# EAGLE board QSPI-Breakout-Panel (EAGLE 9.6.2), part 1 of 2
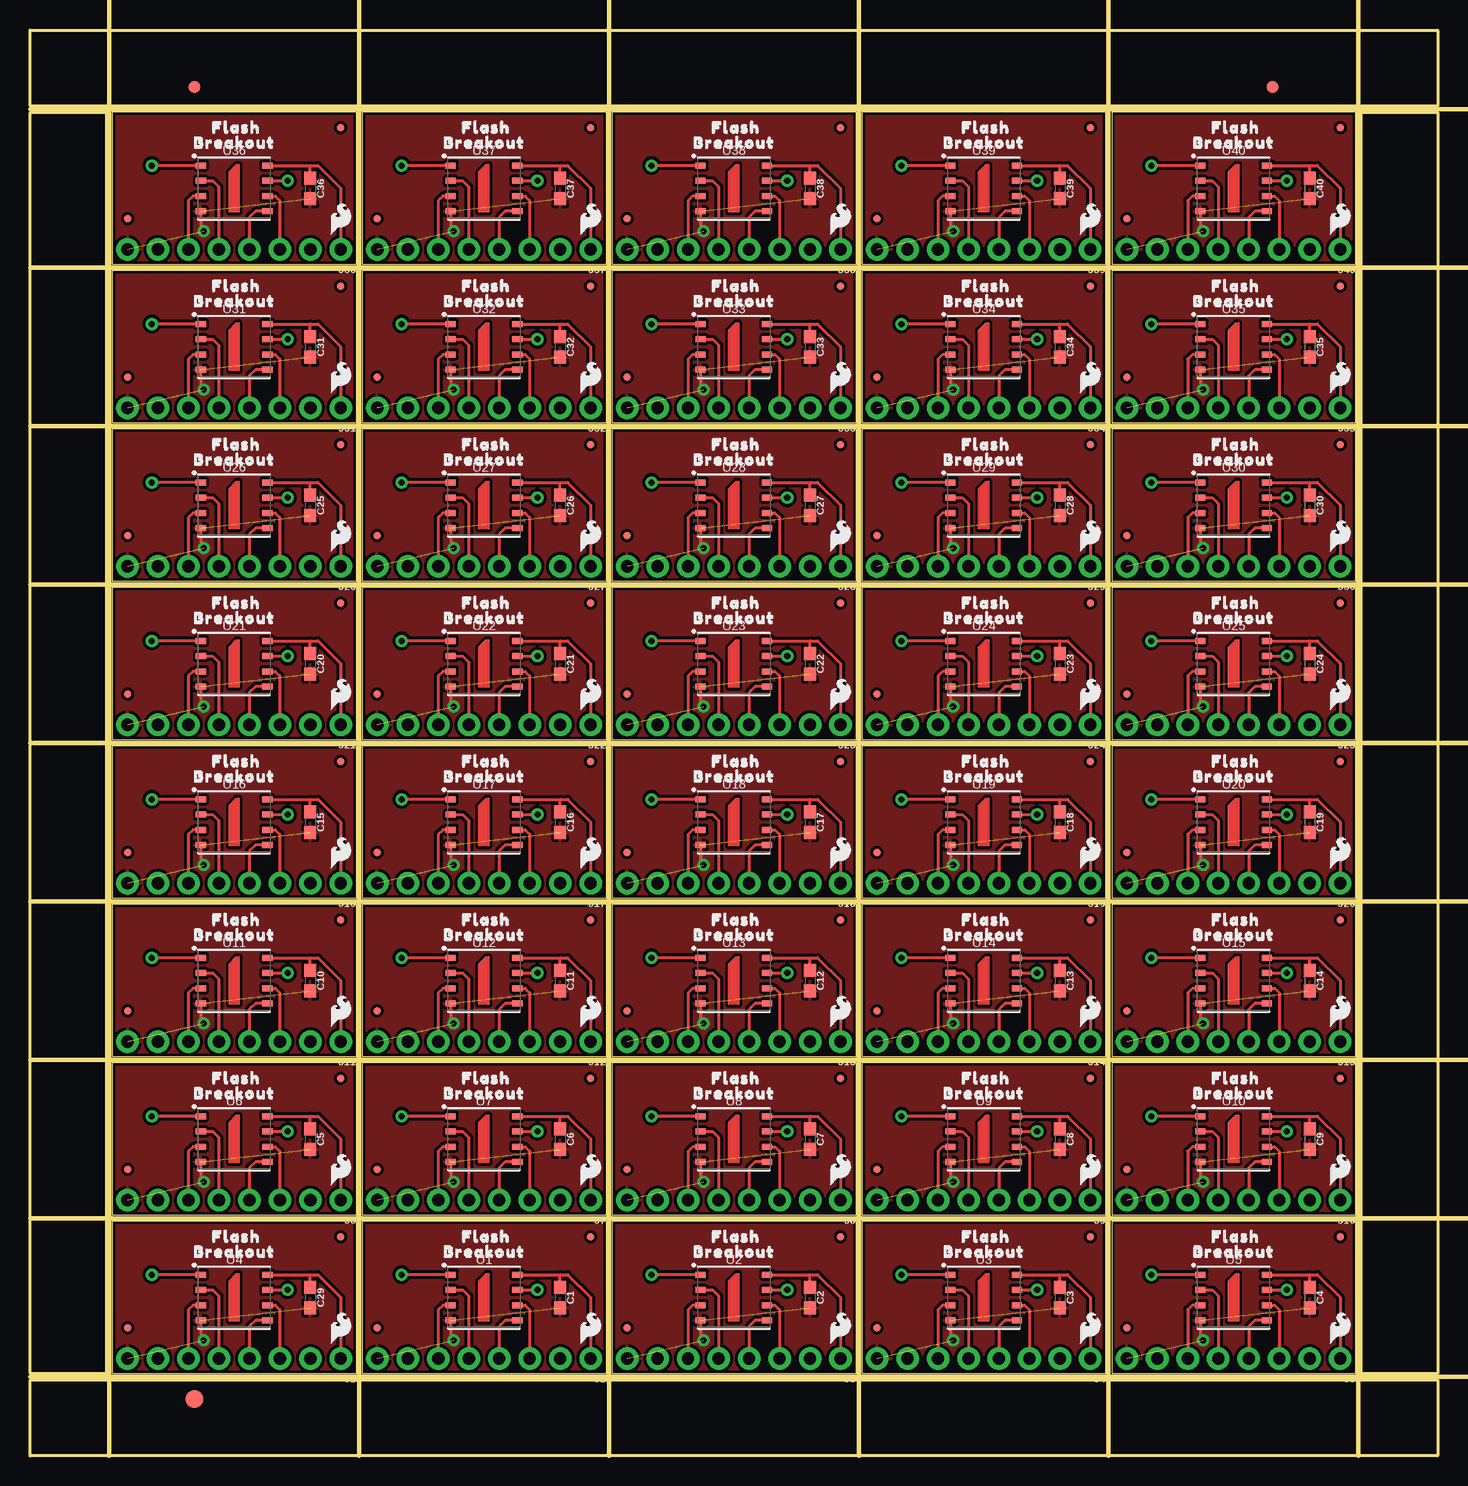
[diagram p0: board, top side]
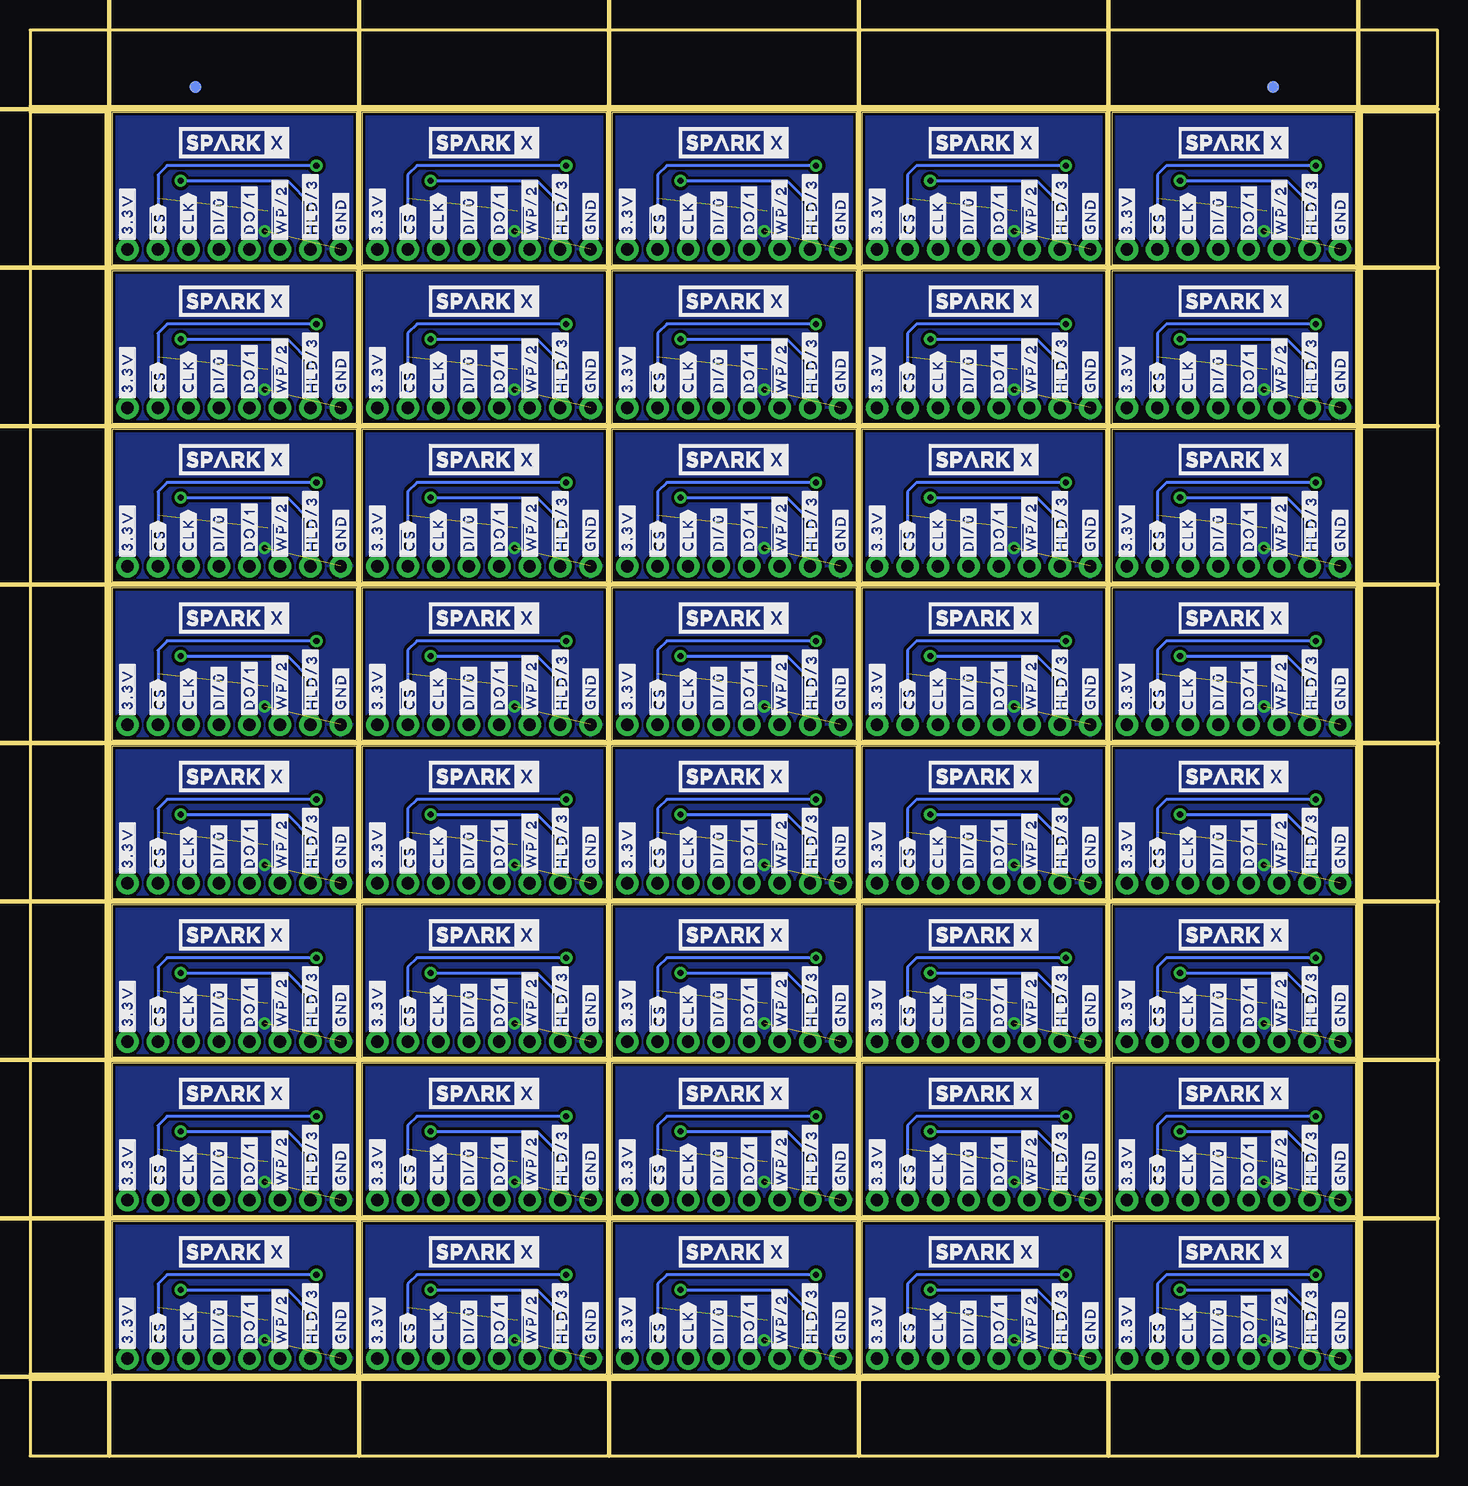
[diagram p1: board, bottom side, seen from below]

Size 117.35 x 118.87 mm. Coordinates in mm from the lower left corner, seen from the top.
Outline: 176 segments
Copper layers (1*16): Top 0.035mm / dielectric 1.5mm / Bottom 0.035mm
Design rules "QSPI-Breakout": minimum track width 10mil, minimum drill 20mil, track to track 10mil, track to pad 8mil, pad to pad 8mil, via to via 10mil, smd to smd 8mil, copper to edge 8mil, drill to drill 8mil, minimum pad ring 10mil, minimum via ring 10mil, stop-mask expansion 4mil, vias tented up to drill 25mil, thermal gap 10mil
Net classes: 2 Clock: width 0.089 mm, clearance 0.178 mm
Milling: 15 lines

## Footprints (pad centres in the part's own frame; a part is rotated, then mirrored left to right if it is on the bottom)
0603 = smd 1.1 x 1: 1 -0.85,0; 2 0.85,0
FIDUCIAL-1X2 = smd 1 x 1: 1 0,0
FIDUCIAL-1.5X3 = smd 1.5 x 1.5: 1 0,0
FIDUCIAL-MICRO = smd 0.635 x 0.635: 1 0,0
1X08_NO_SILK = drill 1.016 pad 1.88: 1 0,0; 2 2.54,0; 3 5.08,0; 4 7.62,0; 5 10.16,0; 6 12.7,0; 7 15.24,0; 8 17.78,0
WSON-8-6X5-SKINNY_CENTERPAD = smd 0.85 x 0.5: 1 -2.775,1.905; 2 -2.775,0.635; 3 -2.775,-0.635; 4 -2.775,-1.905; 5 2.775,-1.905; 6 2.775,-0.635; 7 2.775,0.635; 8 2.775,1.905

## Placement (x,y rotation side)
C1  0.1uF  [0603]  44.2,13.21 270 top
C2  0.1uF  [0603]  65.02,13.21 270 top
C3  0.1uF  [0603]  85.85,13.21 270 top
C4  0.1uF  [0603]  106.68,13.21 270 top
C5  0.1uF  [0603]  23.37,26.42 270 top
C6  0.1uF  [0603]  44.2,26.42 270 top
C7  0.1uF  [0603]  65.02,26.42 270 top
C8  0.1uF  [0603]  85.85,26.42 270 top
C9  0.1uF  [0603]  106.68,26.42 270 top
C10  0.1uF  [0603]  23.37,39.62 270 top
C11  0.1uF  [0603]  44.2,39.62 270 top
C12  0.1uF  [0603]  65.02,39.62 270 top
C13  0.1uF  [0603]  85.85,39.62 270 top
C14  0.1uF  [0603]  106.68,39.62 270 top
C15  0.1uF  [0603]  23.37,52.83 270 top
C16  0.1uF  [0603]  44.2,52.83 270 top
C17  0.1uF  [0603]  65.02,52.83 270 top
C18  0.1uF  [0603]  85.85,52.83 270 top
C19  0.1uF  [0603]  106.68,52.83 270 top
C20  0.1uF  [0603]  23.37,66.04 270 top
C21  0.1uF  [0603]  44.2,66.04 270 top
C22  0.1uF  [0603]  65.02,66.04 270 top
C23  0.1uF  [0603]  85.85,66.04 270 top
C24  0.1uF  [0603]  106.68,66.04 270 top
C25  0.1uF  [0603]  23.37,79.25 270 top
C26  0.1uF  [0603]  44.2,79.25 270 top
C27  0.1uF  [0603]  65.02,79.25 270 top
C28  0.1uF  [0603]  85.85,79.25 270 top
C29  0.1uF  [0603]  23.37,13.21 270 top
C30  0.1uF  [0603]  106.68,79.25 270 top
C31  0.1uF  [0603]  23.37,92.46 270 top
C32  0.1uF  [0603]  44.2,92.46 270 top
C33  0.1uF  [0603]  65.02,92.46 270 top
C34  0.1uF  [0603]  85.85,92.46 270 top
C35  0.1uF  [0603]  106.68,92.46 270 top
C36  0.1uF  [0603]  23.37,105.66 270 top
C37  0.1uF  [0603]  44.2,105.66 270 top
C38  0.1uF  [0603]  65.02,105.66 270 top
C39  0.1uF  [0603]  85.85,105.66 270 top
C40  0.1uF  [0603]  106.68,105.66 270 top
E$1  [FIDUCIAL-1X2]  13.72,114.11 0 top
E$2  [FIDUCIAL-1X2]  13.72,114.11 0 bottom
E$3  [FIDUCIAL-1X2]  103.57,114.11 0 top
E$4  [FIDUCIAL-1X2]  103.57,114.11 0 bottom
E$5  [FIDUCIAL-1.5X3]  13.72,4.76 0 top
FD1  FIDUCIALUFIDUCIAL  [FIDUCIAL-MICRO]  25.91,18.29 0 top
FD2  FIDUCIALUFIDUCIAL  [FIDUCIAL-MICRO]  8.13,10.67 0 top
FD3  FIDUCIALUFIDUCIAL  [FIDUCIAL-MICRO]  46.74,18.29 0 top
FD4  FIDUCIALUFIDUCIAL  [FIDUCIAL-MICRO]  28.96,10.67 0 top
FD5  FIDUCIALUFIDUCIAL  [FIDUCIAL-MICRO]  67.56,18.29 0 top
FD6  FIDUCIALUFIDUCIAL  [FIDUCIAL-MICRO]  49.78,10.67 0 top
FD7  FIDUCIALUFIDUCIAL  [FIDUCIAL-MICRO]  88.39,18.29 0 top
FD8  FIDUCIALUFIDUCIAL  [FIDUCIAL-MICRO]  70.61,10.67 0 top
FD9  FIDUCIALUFIDUCIAL  [FIDUCIAL-MICRO]  109.22,18.29 0 top
FD10  FIDUCIALUFIDUCIAL  [FIDUCIAL-MICRO]  91.44,10.67 0 top
FD11  FIDUCIALUFIDUCIAL  [FIDUCIAL-MICRO]  25.91,31.5 0 top
FD12  FIDUCIALUFIDUCIAL  [FIDUCIAL-MICRO]  8.13,23.88 0 top
FD13  FIDUCIALUFIDUCIAL  [FIDUCIAL-MICRO]  46.74,31.5 0 top
FD14  FIDUCIALUFIDUCIAL  [FIDUCIAL-MICRO]  28.96,23.88 0 top
FD15  FIDUCIALUFIDUCIAL  [FIDUCIAL-MICRO]  67.56,31.5 0 top
FD16  FIDUCIALUFIDUCIAL  [FIDUCIAL-MICRO]  49.78,23.88 0 top
FD17  FIDUCIALUFIDUCIAL  [FIDUCIAL-MICRO]  88.39,31.5 0 top
FD18  FIDUCIALUFIDUCIAL  [FIDUCIAL-MICRO]  70.61,23.88 0 top
FD19  FIDUCIALUFIDUCIAL  [FIDUCIAL-MICRO]  109.22,31.5 0 top
FD20  FIDUCIALUFIDUCIAL  [FIDUCIAL-MICRO]  91.44,23.88 0 top
FD21  FIDUCIALUFIDUCIAL  [FIDUCIAL-MICRO]  25.91,44.7 0 top
FD22  FIDUCIALUFIDUCIAL  [FIDUCIAL-MICRO]  8.13,37.08 0 top
FD23  FIDUCIALUFIDUCIAL  [FIDUCIAL-MICRO]  46.74,44.7 0 top
FD24  FIDUCIALUFIDUCIAL  [FIDUCIAL-MICRO]  28.96,37.08 0 top
FD25  FIDUCIALUFIDUCIAL  [FIDUCIAL-MICRO]  67.56,44.7 0 top
FD26  FIDUCIALUFIDUCIAL  [FIDUCIAL-MICRO]  49.78,37.08 0 top
FD27  FIDUCIALUFIDUCIAL  [FIDUCIAL-MICRO]  88.39,44.7 0 top
FD28  FIDUCIALUFIDUCIAL  [FIDUCIAL-MICRO]  70.61,37.08 0 top
FD29  FIDUCIALUFIDUCIAL  [FIDUCIAL-MICRO]  109.22,44.7 0 top
FD30  FIDUCIALUFIDUCIAL  [FIDUCIAL-MICRO]  91.44,37.08 0 top
FD31  FIDUCIALUFIDUCIAL  [FIDUCIAL-MICRO]  25.91,57.91 0 top
FD32  FIDUCIALUFIDUCIAL  [FIDUCIAL-MICRO]  8.13,50.29 0 top
FD33  FIDUCIALUFIDUCIAL  [FIDUCIAL-MICRO]  46.74,57.91 0 top
FD34  FIDUCIALUFIDUCIAL  [FIDUCIAL-MICRO]  28.96,50.29 0 top
FD35  FIDUCIALUFIDUCIAL  [FIDUCIAL-MICRO]  67.56,57.91 0 top
FD36  FIDUCIALUFIDUCIAL  [FIDUCIAL-MICRO]  49.78,50.29 0 top
FD37  FIDUCIALUFIDUCIAL  [FIDUCIAL-MICRO]  88.39,57.91 0 top
FD38  FIDUCIALUFIDUCIAL  [FIDUCIAL-MICRO]  70.61,50.29 0 top
FD39  FIDUCIALUFIDUCIAL  [FIDUCIAL-MICRO]  109.22,57.91 0 top
FD40  FIDUCIALUFIDUCIAL  [FIDUCIAL-MICRO]  91.44,50.29 0 top
FD41  FIDUCIALUFIDUCIAL  [FIDUCIAL-MICRO]  25.91,71.12 0 top
FD42  FIDUCIALUFIDUCIAL  [FIDUCIAL-MICRO]  8.13,63.5 0 top
FD43  FIDUCIALUFIDUCIAL  [FIDUCIAL-MICRO]  46.74,71.12 0 top
FD44  FIDUCIALUFIDUCIAL  [FIDUCIAL-MICRO]  28.96,63.5 0 top
FD45  FIDUCIALUFIDUCIAL  [FIDUCIAL-MICRO]  67.56,71.12 0 top
FD46  FIDUCIALUFIDUCIAL  [FIDUCIAL-MICRO]  49.78,63.5 0 top
FD47  FIDUCIALUFIDUCIAL  [FIDUCIAL-MICRO]  88.39,71.12 0 top
FD48  FIDUCIALUFIDUCIAL  [FIDUCIAL-MICRO]  70.61,63.5 0 top
FD49  FIDUCIALUFIDUCIAL  [FIDUCIAL-MICRO]  109.22,71.12 0 top
FD50  FIDUCIALUFIDUCIAL  [FIDUCIAL-MICRO]  91.44,63.5 0 top
FD51  FIDUCIALUFIDUCIAL  [FIDUCIAL-MICRO]  25.91,84.33 0 top
FD52  FIDUCIALUFIDUCIAL  [FIDUCIAL-MICRO]  8.13,76.71 0 top
FD53  FIDUCIALUFIDUCIAL  [FIDUCIAL-MICRO]  46.74,84.33 0 top
FD54  FIDUCIALUFIDUCIAL  [FIDUCIAL-MICRO]  28.96,76.71 0 top
FD55  FIDUCIALUFIDUCIAL  [FIDUCIAL-MICRO]  67.56,84.33 0 top
FD56  FIDUCIALUFIDUCIAL  [FIDUCIAL-MICRO]  49.78,76.71 0 top
FD57  FIDUCIALUFIDUCIAL  [FIDUCIAL-MICRO]  88.39,84.33 0 top
FD58  FIDUCIALUFIDUCIAL  [FIDUCIAL-MICRO]  70.61,76.71 0 top
FD59  FIDUCIALUFIDUCIAL  [FIDUCIAL-MICRO]  109.22,84.33 0 top
FD60  FIDUCIALUFIDUCIAL  [FIDUCIAL-MICRO]  91.44,76.71 0 top
FD61  FIDUCIALUFIDUCIAL  [FIDUCIAL-MICRO]  25.91,97.54 0 top
FD62  FIDUCIALUFIDUCIAL  [FIDUCIAL-MICRO]  8.13,89.92 0 top
FD63  FIDUCIALUFIDUCIAL  [FIDUCIAL-MICRO]  46.74,97.54 0 top
FD64  FIDUCIALUFIDUCIAL  [FIDUCIAL-MICRO]  28.96,89.92 0 top
FD65  FIDUCIALUFIDUCIAL  [FIDUCIAL-MICRO]  67.56,97.54 0 top
FD66  FIDUCIALUFIDUCIAL  [FIDUCIAL-MICRO]  49.78,89.92 0 top
FD67  FIDUCIALUFIDUCIAL  [FIDUCIAL-MICRO]  88.39,97.54 0 top
FD68  FIDUCIALUFIDUCIAL  [FIDUCIAL-MICRO]  70.61,89.92 0 top
FD69  FIDUCIALUFIDUCIAL  [FIDUCIAL-MICRO]  109.22,97.54 0 top
FD70  FIDUCIALUFIDUCIAL  [FIDUCIAL-MICRO]  91.44,89.92 0 top
FD71  FIDUCIALUFIDUCIAL  [FIDUCIAL-MICRO]  25.91,110.74 0 top
FD72  FIDUCIALUFIDUCIAL  [FIDUCIAL-MICRO]  8.13,103.12 0 top
FD73  FIDUCIALUFIDUCIAL  [FIDUCIAL-MICRO]  46.74,110.74 0 top
FD74  FIDUCIALUFIDUCIAL  [FIDUCIAL-MICRO]  28.96,103.12 0 top
FD75  FIDUCIALUFIDUCIAL  [FIDUCIAL-MICRO]  67.56,110.74 0 top
FD76  FIDUCIALUFIDUCIAL  [FIDUCIAL-MICRO]  49.78,103.12 0 top
FD77  FIDUCIALUFIDUCIAL  [FIDUCIAL-MICRO]  88.39,110.74 0 top
FD78  FIDUCIALUFIDUCIAL  [FIDUCIAL-MICRO]  70.61,103.12 0 top
FD79  FIDUCIALUFIDUCIAL  [FIDUCIAL-MICRO]  109.22,110.74 0 top
FD80  FIDUCIALUFIDUCIAL  [FIDUCIAL-MICRO]  91.44,103.12 0 top
J1  [1X08_NO_SILK]  25.91,8.13 180 top
J2  [1X08_NO_SILK]  46.74,8.13 180 top
J3  [1X08_NO_SILK]  67.56,8.13 180 top
J4  [1X08_NO_SILK]  88.39,8.13 180 top
J5  [1X08_NO_SILK]  109.22,8.13 180 top
J6  [1X08_NO_SILK]  25.91,21.34 180 top
J7  [1X08_NO_SILK]  46.74,21.34 180 top
J8  [1X08_NO_SILK]  67.56,21.34 180 top
J9  [1X08_NO_SILK]  88.39,21.34 180 top
J10  [1X08_NO_SILK]  109.22,21.34 180 top
J11  [1X08_NO_SILK]  25.91,34.54 180 top
J12  [1X08_NO_SILK]  46.74,34.54 180 top
J13  [1X08_NO_SILK]  67.56,34.54 180 top
J14  [1X08_NO_SILK]  88.39,34.54 180 top
J15  [1X08_NO_SILK]  109.22,34.54 180 top
J16  [1X08_NO_SILK]  25.91,47.75 180 top
J17  [1X08_NO_SILK]  46.74,47.75 180 top
J18  [1X08_NO_SILK]  67.56,47.75 180 top
J19  [1X08_NO_SILK]  88.39,47.75 180 top
J20  [1X08_NO_SILK]  109.22,47.75 180 top
J21  [1X08_NO_SILK]  25.91,60.96 180 top
J22  [1X08_NO_SILK]  46.74,60.96 180 top
J23  [1X08_NO_SILK]  67.56,60.96 180 top
J24  [1X08_NO_SILK]  88.39,60.96 180 top
J25  [1X08_NO_SILK]  109.22,60.96 180 top
J26  [1X08_NO_SILK]  25.91,74.17 180 top
J27  [1X08_NO_SILK]  46.74,74.17 180 top
J28  [1X08_NO_SILK]  67.56,74.17 180 top
J29  [1X08_NO_SILK]  88.39,74.17 180 top
J30  [1X08_NO_SILK]  109.22,74.17 180 top
J31  [1X08_NO_SILK]  25.91,87.38 180 top
J32  [1X08_NO_SILK]  46.74,87.38 180 top
J33  [1X08_NO_SILK]  67.56,87.38 180 top
J34  [1X08_NO_SILK]  88.39,87.38 180 top
J35  [1X08_NO_SILK]  109.22,87.38 180 top
J36  [1X08_NO_SILK]  25.91,100.58 180 top
J37  [1X08_NO_SILK]  46.74,100.58 180 top
J38  [1X08_NO_SILK]  67.56,100.58 180 top
J39  [1X08_NO_SILK]  88.39,100.58 180 top
J40  [1X08_NO_SILK]  109.22,100.58 180 top
LOGO1  OSHW-LOGONO_SILK  [DUMMY]  16.26,-4.57 0 top  (outside the outline)
LOGO2  OSHW-LOGONO_SILK  [DUMMY]  -4.57,-4.57 0 top  (outside the outline)
LOGO3  OSHW-LOGONO_SILK  [DUMMY]  37.08,-4.57 0 top  (outside the outline)
LOGO4  OSHW-LOGONO_SILK  [DUMMY]  57.91,-4.57 0 top  (outside the outline)
LOGO5  OSHW-LOGONO_SILK  [DUMMY]  78.74,-4.57 0 top  (outside the outline)
LOGO6  OSHW-LOGONO_SILK  [DUMMY]  -4.57,8.64 0 top  (outside the outline)
LOGO7  OSHW-LOGONO_SILK  [DUMMY]  16.26,8.64 0 top
LOGO8  OSHW-LOGONO_SILK  [DUMMY]  37.08,8.64 0 top
LOGO9  OSHW-LOGONO_SILK  [DUMMY]  57.91,8.64 0 top
LOGO10  OSHW-LOGONO_SILK  [DUMMY]  78.74,8.64 0 top
LOGO11  OSHW-LOGONO_SILK  [DUMMY]  -4.57,21.84 0 top  (outside the outline)
LOGO12  OSHW-LOGONO_SILK  [DUMMY]  16.26,21.84 0 top
LOGO13  OSHW-LOGONO_SILK  [DUMMY]  37.08,21.84 0 top
LOGO14  OSHW-LOGONO_SILK  [DUMMY]  57.91,21.84 0 top
LOGO15  OSHW-LOGONO_SILK  [DUMMY]  78.74,21.84 0 top
LOGO16  OSHW-LOGONO_SILK  [DUMMY]  -4.57,35.05 0 top  (outside the outline)
LOGO17  OSHW-LOGONO_SILK  [DUMMY]  16.26,35.05 0 top
LOGO18  OSHW-LOGONO_SILK  [DUMMY]  37.08,35.05 0 top
LOGO19  OSHW-LOGONO_SILK  [DUMMY]  57.91,35.05 0 top
LOGO20  OSHW-LOGONO_SILK  [DUMMY]  78.74,35.05 0 top
LOGO21  OSHW-LOGONO_SILK  [DUMMY]  -4.57,48.26 0 top  (outside the outline)
LOGO22  OSHW-LOGONO_SILK  [DUMMY]  16.26,48.26 0 top
LOGO23  OSHW-LOGONO_SILK  [DUMMY]  37.08,48.26 0 top
LOGO24  OSHW-LOGONO_SILK  [DUMMY]  57.91,48.26 0 top
LOGO25  OSHW-LOGONO_SILK  [DUMMY]  78.74,48.26 0 top
LOGO26  OSHW-LOGONO_SILK  [DUMMY]  -4.57,61.47 0 top  (outside the outline)
LOGO27  OSHW-LOGONO_SILK  [DUMMY]  16.26,61.47 0 top
LOGO28  OSHW-LOGONO_SILK  [DUMMY]  37.08,61.47 0 top
LOGO29  OSHW-LOGONO_SILK  [DUMMY]  57.91,61.47 0 top
LOGO30  OSHW-LOGONO_SILK  [DUMMY]  78.74,61.47 0 top
LOGO31  OSHW-LOGONO_SILK  [DUMMY]  -4.57,74.68 0 top  (outside the outline)
LOGO32  OSHW-LOGONO_SILK  [DUMMY]  16.26,74.68 0 top
LOGO33  OSHW-LOGONO_SILK  [DUMMY]  37.08,74.68 0 top
LOGO34  OSHW-LOGONO_SILK  [DUMMY]  57.91,74.68 0 top
LOGO35  OSHW-LOGONO_SILK  [DUMMY]  78.74,74.68 0 top
LOGO36  OSHW-LOGONO_SILK  [DUMMY]  -4.57,87.88 0 top  (outside the outline)
LOGO37  OSHW-LOGONO_SILK  [DUMMY]  16.26,87.88 0 top
LOGO38  OSHW-LOGONO_SILK  [DUMMY]  37.08,87.88 0 top
LOGO39  OSHW-LOGONO_SILK  [DUMMY]  57.91,87.88 0 top
LOGO40  OSHW-LOGONO_SILK  [DUMMY]  78.74,87.88 0 top
U1  W25QXX128MBIT-6X5  [WSON-8-6X5-SKINNY_CENTERPAD]  37.85,13.21 0 top
U2  W25QXX128MBIT-6X5  [WSON-8-6X5-SKINNY_CENTERPAD]  58.67,13.21 0 top
U3  W25QXX128MBIT-6X5  [WSON-8-6X5-SKINNY_CENTERPAD]  79.5,13.21 0 top
U4  W25QXX128MBIT-6X5  [WSON-8-6X5-SKINNY_CENTERPAD]  17.02,13.21 0 top
U5  W25QXX128MBIT-6X5  [WSON-8-6X5-SKINNY_CENTERPAD]  100.33,13.21 0 top
U6  W25QXX128MBIT-6X5  [WSON-8-6X5-SKINNY_CENTERPAD]  17.02,26.42 0 top
U7  W25QXX128MBIT-6X5  [WSON-8-6X5-SKINNY_CENTERPAD]  37.85,26.42 0 top
U8  W25QXX128MBIT-6X5  [WSON-8-6X5-SKINNY_CENTERPAD]  58.67,26.42 0 top
U9  W25QXX128MBIT-6X5  [WSON-8-6X5-SKINNY_CENTERPAD]  79.5,26.42 0 top
U10  W25QXX128MBIT-6X5  [WSON-8-6X5-SKINNY_CENTERPAD]  100.33,26.42 0 top
U11  W25QXX128MBIT-6X5  [WSON-8-6X5-SKINNY_CENTERPAD]  17.02,39.62 0 top
U12  W25QXX128MBIT-6X5  [WSON-8-6X5-SKINNY_CENTERPAD]  37.85,39.62 0 top
U13  W25QXX128MBIT-6X5  [WSON-8-6X5-SKINNY_CENTERPAD]  58.67,39.62 0 top
U14  W25QXX128MBIT-6X5  [WSON-8-6X5-SKINNY_CENTERPAD]  79.5,39.62 0 top
U15  W25QXX128MBIT-6X5  [WSON-8-6X5-SKINNY_CENTERPAD]  100.33,39.62 0 top
U16  W25QXX128MBIT-6X5  [WSON-8-6X5-SKINNY_CENTERPAD]  17.02,52.83 0 top
U17  W25QXX128MBIT-6X5  [WSON-8-6X5-SKINNY_CENTERPAD]  37.85,52.83 0 top
U18  W25QXX128MBIT-6X5  [WSON-8-6X5-SKINNY_CENTERPAD]  58.67,52.83 0 top
U19  W25QXX128MBIT-6X5  [WSON-8-6X5-SKINNY_CENTERPAD]  79.5,52.83 0 top
U20  W25QXX128MBIT-6X5  [WSON-8-6X5-SKINNY_CENTERPAD]  100.33,52.83 0 top
U21  W25QXX128MBIT-6X5  [WSON-8-6X5-SKINNY_CENTERPAD]  17.02,66.04 0 top
U22  W25QXX128MBIT-6X5  [WSON-8-6X5-SKINNY_CENTERPAD]  37.85,66.04 0 top
U23  W25QXX128MBIT-6X5  [WSON-8-6X5-SKINNY_CENTERPAD]  58.67,66.04 0 top
U24  W25QXX128MBIT-6X5  [WSON-8-6X5-SKINNY_CENTERPAD]  79.5,66.04 0 top
U25  W25QXX128MBIT-6X5  [WSON-8-6X5-SKINNY_CENTERPAD]  100.33,66.04 0 top
U26  W25QXX128MBIT-6X5  [WSON-8-6X5-SKINNY_CENTERPAD]  17.02,79.25 0 top
U27  W25QXX128MBIT-6X5  [WSON-8-6X5-SKINNY_CENTERPAD]  37.85,79.25 0 top
U28  W25QXX128MBIT-6X5  [WSON-8-6X5-SKINNY_CENTERPAD]  58.67,79.25 0 top
U29  W25QXX128MBIT-6X5  [WSON-8-6X5-SKINNY_CENTERPAD]  79.5,79.25 0 top
U30  W25QXX128MBIT-6X5  [WSON-8-6X5-SKINNY_CENTERPAD]  100.33,79.25 0 top
U31  W25QXX128MBIT-6X5  [WSON-8-6X5-SKINNY_CENTERPAD]  17.02,92.46 0 top
U32  W25QXX128MBIT-6X5  [WSON-8-6X5-SKINNY_CENTERPAD]  37.85,92.46 0 top
U33  W25QXX128MBIT-6X5  [WSON-8-6X5-SKINNY_CENTERPAD]  58.67,92.46 0 top
U34  W25QXX128MBIT-6X5  [WSON-8-6X5-SKINNY_CENTERPAD]  79.5,92.46 0 top
U35  W25QXX128MBIT-6X5  [WSON-8-6X5-SKINNY_CENTERPAD]  100.33,92.46 0 top
U36  W25QXX128MBIT-6X5  [WSON-8-6X5-SKINNY_CENTERPAD]  17.02,105.66 0 top
U37  W25QXX128MBIT-6X5  [WSON-8-6X5-SKINNY_CENTERPAD]  37.85,105.66 0 top
U38  W25QXX128MBIT-6X5  [WSON-8-6X5-SKINNY_CENTERPAD]  58.67,105.66 0 top
U39  W25QXX128MBIT-6X5  [WSON-8-6X5-SKINNY_CENTERPAD]  79.5,105.66 0 top
U40  W25QXX128MBIT-6X5  [WSON-8-6X5-SKINNY_CENTERPAD]  100.33,105.66 0 top
U$1  [BREAKOUT1]  12.95,17.02 0 top
U$2  [FLASH0]  14.48,18.29 0 top
U$3  SPARKX-LOGO4  [SPARKX-MEDIUM]  17.02,17.02 0 bottom
U$4  [##HLD##3#2]  10.67,8.64 90 bottom
U$5  [##WP##2#3]  13.21,8.64 90 bottom
U$6  [SFE_LOGO_FLAME_.1]  25.91,10.67 0 top
U$7  [#3#3V#1]  25.91,8.64 90 bottom
U$8  [#CLK#6]  20.83,8.64 90 bottom
U$9  [#DI#0#5]  18.29,8.64 90 bottom
U$10  [#DO#1#4]  15.75,8.64 90 bottom
U$11  [#GND#0]  8.13,8.64 90 bottom
U$12  [##CS##7]  23.37,8.64 90 bottom
U$13  [SFE_LOGO_FLAME_.1]  46.74,10.67 0 top
U$14  [BREAKOUT1]  33.78,17.02 0 top
U$15  [FLASH0]  35.31,18.29 0 top
U$16  [##HLD##3#2]  31.5,8.64 90 bottom
U$17  [##WP##2#3]  34.04,8.64 90 bottom
U$18  [#3#3V#1]  46.74,8.64 90 bottom
U$19  [#CLK#6]  41.66,8.64 90 bottom
U$20  [#DI#0#5]  39.12,8.64 90 bottom
U$21  [#DO#1#4]  36.58,8.64 90 bottom
U$22  [#GND#0]  28.96,8.64 90 bottom
U$23  [##CS##7]  44.2,8.64 90 bottom
U$24  SPARKX-LOGO4  [SPARKX-MEDIUM]  37.85,17.02 0 bottom
U$25  [SFE_LOGO_FLAME_.1]  67.56,10.67 0 top
U$26  [BREAKOUT1]  54.61,17.02 0 top
U$27  [FLASH0]  56.13,18.29 0 top
U$28  [##HLD##3#2]  52.32,8.64 90 bottom
U$29  [##WP##2#3]  54.86,8.64 90 bottom
U$30  [#3#3V#1]  67.56,8.64 90 bottom
U$31  [#CLK#6]  62.48,8.64 90 bottom
U$32  [#DI#0#5]  59.94,8.64 90 bottom
U$33  [#DO#1#4]  57.4,8.64 90 bottom
U$34  [#GND#0]  49.78,8.64 90 bottom
U$35  [##CS##7]  65.02,8.64 90 bottom
U$36  SPARKX-LOGO4  [SPARKX-MEDIUM]  58.67,17.02 0 bottom
U$37  [SFE_LOGO_FLAME_.1]  88.39,10.67 0 top
U$38  [BREAKOUT1]  75.44,17.02 0 top
U$39  [FLASH0]  76.96,18.29 0 top
U$40  [##HLD##3#2]  73.15,8.64 90 bottom
U$41  [##WP##2#3]  75.69,8.64 90 bottom
U$42  [#3#3V#1]  88.39,8.64 90 bottom
U$43  [#CLK#6]  83.31,8.64 90 bottom
U$44  [#DI#0#5]  80.77,8.64 90 bottom
U$45  [#DO#1#4]  78.23,8.64 90 bottom
U$46  [#GND#0]  70.61,8.64 90 bottom
U$47  [##CS##7]  85.85,8.64 90 bottom
U$48  SPARKX-LOGO4  [SPARKX-MEDIUM]  79.5,17.02 0 bottom
U$49  [SFE_LOGO_FLAME_.1]  109.22,10.67 0 top
U$50  [BREAKOUT1]  96.27,17.02 0 top
U$51  [FLASH0]  97.79,18.29 0 top
U$52  [##HLD##3#2]  93.98,8.64 90 bottom
U$53  [##WP##2#3]  96.52,8.64 90 bottom
U$54  [#3#3V#1]  109.22,8.64 90 bottom
U$55  [#CLK#6]  104.14,8.64 90 bottom
U$56  [#DI#0#5]  101.6,8.64 90 bottom
U$57  [#DO#1#4]  99.06,8.64 90 bottom
U$58  [#GND#0]  91.44,8.64 90 bottom
U$59  [##CS##7]  106.68,8.64 90 bottom
U$60  SPARKX-LOGO4  [SPARKX-MEDIUM]  100.33,17.02 0 bottom
U$61  [SFE_LOGO_FLAME_.1]  25.91,23.88 0 top
U$62  [BREAKOUT1]  12.95,30.23 0 top
U$63  [FLASH0]  14.48,31.5 0 top
U$64  [##HLD##3#2]  10.67,21.84 90 bottom
U$65  [##WP##2#3]  13.21,21.84 90 bottom
U$66  [#3#3V#1]  25.91,21.84 90 bottom
U$67  [#CLK#6]  20.83,21.84 90 bottom
U$68  [#DI#0#5]  18.29,21.84 90 bottom
U$69  [#DO#1#4]  15.75,21.84 90 bottom
U$70  [#GND#0]  8.13,21.84 90 bottom
U$71  [##CS##7]  23.37,21.84 90 bottom
U$72  SPARKX-LOGO4  [SPARKX-MEDIUM]  17.02,30.23 0 bottom
U$73  [SFE_LOGO_FLAME_.1]  46.74,23.88 0 top
U$74  [BREAKOUT1]  33.78,30.23 0 top
U$75  [FLASH0]  35.31,31.5 0 top
U$76  [##HLD##3#2]  31.5,21.84 90 bottom
U$77  [##WP##2#3]  34.04,21.84 90 bottom
U$78  [#3#3V#1]  46.74,21.84 90 bottom
U$79  [#CLK#6]  41.66,21.84 90 bottom
U$80  [#DI#0#5]  39.12,21.84 90 bottom
U$81  [#DO#1#4]  36.58,21.84 90 bottom
U$82  [#GND#0]  28.96,21.84 90 bottom
U$83  [##CS##7]  44.2,21.84 90 bottom
U$84  SPARKX-LOGO4  [SPARKX-MEDIUM]  37.85,30.23 0 bottom
U$85  [SFE_LOGO_FLAME_.1]  67.56,23.88 0 top
U$86  [BREAKOUT1]  54.61,30.23 0 top
U$87  [FLASH0]  56.13,31.5 0 top
U$88  [##HLD##3#2]  52.32,21.84 90 bottom
U$89  [##WP##2#3]  54.86,21.84 90 bottom
U$90  [#3#3V#1]  67.56,21.84 90 bottom
U$91  [#CLK#6]  62.48,21.84 90 bottom
U$92  [#DI#0#5]  59.94,21.84 90 bottom
U$93  [#DO#1#4]  57.4,21.84 90 bottom
U$94  [#GND#0]  49.78,21.84 90 bottom
U$95  [##CS##7]  65.02,21.84 90 bottom
U$96  SPARKX-LOGO4  [SPARKX-MEDIUM]  58.67,30.23 0 bottom
U$97  [SFE_LOGO_FLAME_.1]  88.39,23.88 0 top
U$98  [BREAKOUT1]  75.44,30.23 0 top
U$99  [FLASH0]  76.96,31.5 0 top
U$100  [##HLD##3#2]  73.15,21.84 90 bottom
U$101  [##WP##2#3]  75.69,21.84 90 bottom
U$102  [#3#3V#1]  88.39,21.84 90 bottom
U$103  [#CLK#6]  83.31,21.84 90 bottom
U$104  [#DI#0#5]  80.77,21.84 90 bottom
U$105  [#DO#1#4]  78.23,21.84 90 bottom
U$106  [#GND#0]  70.61,21.84 90 bottom
U$107  [##CS##7]  85.85,21.84 90 bottom
U$108  SPARKX-LOGO4  [SPARKX-MEDIUM]  79.5,30.23 0 bottom
U$109  [SFE_LOGO_FLAME_.1]  109.22,23.88 0 top
U$110  [BREAKOUT1]  96.27,30.23 0 top
U$111  [FLASH0]  97.79,31.5 0 top
U$112  [##HLD##3#2]  93.98,21.84 90 bottom
U$113  [##WP##2#3]  96.52,21.84 90 bottom
U$114  [#3#3V#1]  109.22,21.84 90 bottom
U$115  [#CLK#6]  104.14,21.84 90 bottom
U$116  [#DI#0#5]  101.6,21.84 90 bottom
U$117  [#DO#1#4]  99.06,21.84 90 bottom
U$118  [#GND#0]  91.44,21.84 90 bottom
U$119  [##CS##7]  106.68,21.84 90 bottom
U$120  SPARKX-LOGO4  [SPARKX-MEDIUM]  100.33,30.23 0 bottom
U$121  [SFE_LOGO_FLAME_.1]  25.91,37.08 0 top
U$122  [BREAKOUT1]  12.95,43.43 0 top
U$123  [FLASH0]  14.48,44.7 0 top
U$124  [##HLD##3#2]  10.67,35.05 90 bottom
U$125  [##WP##2#3]  13.21,35.05 90 bottom
U$126  [#3#3V#1]  25.91,35.05 90 bottom
U$127  [#CLK#6]  20.83,35.05 90 bottom
U$128  [#DI#0#5]  18.29,35.05 90 bottom
U$129  [#DO#1#4]  15.75,35.05 90 bottom
U$130  [#GND#0]  8.13,35.05 90 bottom
U$131  [##CS##7]  23.37,35.05 90 bottom
U$132  SPARKX-LOGO4  [SPARKX-MEDIUM]  17.02,43.43 0 bottom
U$133  [SFE_LOGO_FLAME_.1]  46.74,37.08 0 top
U$134  [BREAKOUT1]  33.78,43.43 0 top
U$135  [FLASH0]  35.31,44.7 0 top
U$136  [##HLD##3#2]  31.5,35.05 90 bottom
U$137  [##WP##2#3]  34.04,35.05 90 bottom
U$138  [#3#3V#1]  46.74,35.05 90 bottom
U$139  [#CLK#6]  41.66,35.05 90 bottom
U$140  [#DI#0#5]  39.12,35.05 90 bottom
U$141  [#DO#1#4]  36.58,35.05 90 bottom
U$142  [#GND#0]  28.96,35.05 90 bottom
U$143  [##CS##7]  44.2,35.05 90 bottom
U$144  SPARKX-LOGO4  [SPARKX-MEDIUM]  37.85,43.43 0 bottom
U$145  [SFE_LOGO_FLAME_.1]  67.56,37.08 0 top
U$146  [BREAKOUT1]  54.61,43.43 0 top
U$147  [FLASH0]  56.13,44.7 0 top
U$148  [##HLD##3#2]  52.32,35.05 90 bottom
U$149  [##WP##2#3]  54.86,35.05 90 bottom
U$150  [#3#3V#1]  67.56,35.05 90 bottom
U$151  [#CLK#6]  62.48,35.05 90 bottom
U$152  [#DI#0#5]  59.94,35.05 90 bottom
U$153  [#DO#1#4]  57.4,35.05 90 bottom
U$154  [#GND#0]  49.78,35.05 90 bottom
U$155  [##CS##7]  65.02,35.05 90 bottom
U$156  SPARKX-LOGO4  [SPARKX-MEDIUM]  58.67,43.43 0 bottom
U$157  [SFE_LOGO_FLAME_.1]  88.39,37.08 0 top
U$158  [BREAKOUT1]  75.44,43.43 0 top
U$159  [FLASH0]  76.96,44.7 0 top
U$160  [##HLD##3#2]  73.15,35.05 90 bottom
U$161  [##WP##2#3]  75.69,35.05 90 bottom
U$162  [#3#3V#1]  88.39,35.05 90 bottom
U$163  [#CLK#6]  83.31,35.05 90 bottom
U$164  [#DI#0#5]  80.77,35.05 90 bottom
U$165  [#DO#1#4]  78.23,35.05 90 bottom
U$166  [#GND#0]  70.61,35.05 90 bottom
U$167  [##CS##7]  85.85,35.05 90 bottom
U$168  SPARKX-LOGO4  [SPARKX-MEDIUM]  79.5,43.43 0 bottom
U$169  [SFE_LOGO_FLAME_.1]  109.22,37.08 0 top
U$170  [BREAKOUT1]  96.27,43.43 0 top
U$171  [FLASH0]  97.79,44.7 0 top
U$172  [##HLD##3#2]  93.98,35.05 90 bottom
U$173  [##WP##2#3]  96.52,35.05 90 bottom
U$174  [#3#3V#1]  109.22,35.05 90 bottom
U$175  [#CLK#6]  104.14,35.05 90 bottom
U$176  [#DI#0#5]  101.6,35.05 90 bottom
U$177  [#DO#1#4]  99.06,35.05 90 bottom
U$178  [#GND#0]  91.44,35.05 90 bottom
U$179  [##CS##7]  106.68,35.05 90 bottom
U$180  SPARKX-LOGO4  [SPARKX-MEDIUM]  100.33,43.43 0 bottom
U$181  [SFE_LOGO_FLAME_.1]  25.91,50.29 0 top
U$182  [BREAKOUT1]  12.95,56.64 0 top
U$183  [FLASH0]  14.48,57.91 0 top
U$184  [##HLD##3#2]  10.67,48.26 90 bottom
U$185  [##WP##2#3]  13.21,48.26 90 bottom
U$186  [#3#3V#1]  25.91,48.26 90 bottom
U$187  [#CLK#6]  20.83,48.26 90 bottom
U$188  [#DI#0#5]  18.29,48.26 90 bottom
U$189  [#DO#1#4]  15.75,48.26 90 bottom
U$190  [#GND#0]  8.13,48.26 90 bottom
U$191  [##CS##7]  23.37,48.26 90 bottom
U$192  SPARKX-LOGO4  [SPARKX-MEDIUM]  17.02,56.64 0 bottom
U$193  [SFE_LOGO_FLAME_.1]  46.74,50.29 0 top
U$194  [BREAKOUT1]  33.78,56.64 0 top
U$195  [FLASH0]  35.31,57.91 0 top
U$196  [##HLD##3#2]  31.5,48.26 90 bottom
U$197  [##WP##2#3]  34.04,48.26 90 bottom
U$198  [#3#3V#1]  46.74,48.26 90 bottom
U$199  [#CLK#6]  41.66,48.26 90 bottom
U$200  [#DI#0#5]  39.12,48.26 90 bottom
U$201  [#DO#1#4]  36.58,48.26 90 bottom
U$202  [#GND#0]  28.96,48.26 90 bottom
U$203  [##CS##7]  44.2,48.26 90 bottom
U$204  SPARKX-LOGO4  [SPARKX-MEDIUM]  37.85,56.64 0 bottom
U$205  [SFE_LOGO_FLAME_.1]  67.56,50.29 0 top
U$206  [BREAKOUT1]  54.61,56.64 0 top
U$207  [FLASH0]  56.13,57.91 0 top
U$208  [##HLD##3#2]  52.32,48.26 90 bottom
U$209  [##WP##2#3]  54.86,48.26 90 bottom
U$210  [#3#3V#1]  67.56,48.26 90 bottom
U$211  [#CLK#6]  62.48,48.26 90 bottom
U$212  [#DI#0#5]  59.94,48.26 90 bottom
U$213  [#DO#1#4]  57.4,48.26 90 bottom
U$214  [#GND#0]  49.78,48.26 90 bottom
U$215  [##CS##7]  65.02,48.26 90 bottom
U$216  SPARKX-LOGO4  [SPARKX-MEDIUM]  58.67,56.64 0 bottom
U$217  [SFE_LOGO_FLAME_.1]  88.39,50.29 0 top
U$218  [BREAKOUT1]  75.44,56.64 0 top
U$219  [FLASH0]  76.96,57.91 0 top
U$220  [##HLD##3#2]  73.15,48.26 90 bottom
U$221  [##WP##2#3]  75.69,48.26 90 bottom
U$222  [#3#3V#1]  88.39,48.26 90 bottom
U$223  [#CLK#6]  83.31,48.26 90 bottom
U$224  [#DI#0#5]  80.77,48.26 90 bottom
U$225  [#DO#1#4]  78.23,48.26 90 bottom
U$226  [#GND#0]  70.61,48.26 90 bottom
U$227  [##CS##7]  85.85,48.26 90 bottom
U$228  SPARKX-LOGO4  [SPARKX-MEDIUM]  79.5,56.64 0 bottom
U$229  [SFE_LOGO_FLAME_.1]  109.22,50.29 0 top
U$230  [BREAKOUT1]  96.27,56.64 0 top
U$231  [FLASH0]  97.79,57.91 0 top
U$232  [##HLD##3#2]  93.98,48.26 90 bottom
U$233  [##WP##2#3]  96.52,48.26 90 bottom
U$234  [#3#3V#1]  109.22,48.26 90 bottom
U$235  [#CLK#6]  104.14,48.26 90 bottom
U$236  [#DI#0#5]  101.6,48.26 90 bottom
U$237  [#DO#1#4]  99.06,48.26 90 bottom
U$238  [#GND#0]  91.44,48.26 90 bottom
U$239  [##CS##7]  106.68,48.26 90 bottom
U$240  SPARKX-LOGO4  [SPARKX-MEDIUM]  100.33,56.64 0 bottom
U$241  [SFE_LOGO_FLAME_.1]  25.91,63.5 0 top
U$242  [BREAKOUT1]  12.95,69.85 0 top
U$243  [FLASH0]  14.48,71.12 0 top
U$244  [##HLD##3#2]  10.67,61.47 90 bottom
U$245  [##WP##2#3]  13.21,61.47 90 bottom
U$246  [#3#3V#1]  25.91,61.47 90 bottom
U$247  [#CLK#6]  20.83,61.47 90 bottom
U$248  [#DI#0#5]  18.29,61.47 90 bottom
U$249  [#DO#1#4]  15.75,61.47 90 bottom
U$250  [#GND#0]  8.13,61.47 90 bottom
U$251  [##CS##7]  23.37,61.47 90 bottom
U$252  SPARKX-LOGO4  [SPARKX-MEDIUM]  17.02,69.85 0 bottom
U$253  [SFE_LOGO_FLAME_.1]  46.74,63.5 0 top
U$254  [BREAKOUT1]  33.78,69.85 0 top
U$255  [FLASH0]  35.31,71.12 0 top
U$256  [##HLD##3#2]  31.5,61.47 90 bottom
U$257  [##WP##2#3]  34.04,61.47 90 bottom
U$258  [#3#3V#1]  46.74,61.47 90 bottom
U$259  [#CLK#6]  41.66,61.47 90 bottom
U$260  [#DI#0#5]  39.12,61.47 90 bottom
U$261  [#DO#1#4]  36.58,61.47 90 bottom
U$262  [#GND#0]  28.96,61.47 90 bottom
U$263  [##CS##7]  44.2,61.47 90 bottom
U$264  SPARKX-LOGO4  [SPARKX-MEDIUM]  37.85,69.85 0 bottom
U$265  [SFE_LOGO_FLAME_.1]  67.56,63.5 0 top
U$266  [BREAKOUT1]  54.61,69.85 0 top
U$267  [FLASH0]  56.13,71.12 0 top
U$268  [##HLD##3#2]  52.32,61.47 90 bottom
U$269  [##WP##2#3]  54.86,61.47 90 bottom
U$270  [#3#3V#1]  67.56,61.47 90 bottom
U$271  [#CLK#6]  62.48,61.47 90 bottom
U$272  [#DI#0#5]  59.94,61.47 90 bottom
U$273  [#DO#1#4]  57.4,61.47 90 bottom
U$274  [#GND#0]  49.78,61.47 90 bottom
U$275  [##CS##7]  65.02,61.47 90 bottom
U$276  SPARKX-LOGO4  [SPARKX-MEDIUM]  58.67,69.85 0 bottom
U$277  [SFE_LOGO_FLAME_.1]  88.39,63.5 0 top
U$278  [BREAKOUT1]  75.44,69.85 0 top
U$279  [FLASH0]  76.96,71.12 0 top
U$280  [##HLD##3#2]  73.15,61.47 90 bottom
U$281  [##WP##2#3]  75.69,61.47 90 bottom
U$282  [#3#3V#1]  88.39,61.47 90 bottom
U$283  [#CLK#6]  83.31,61.47 90 bottom
U$284  [#DI#0#5]  80.77,61.47 90 bottom
U$285  [#DO#1#4]  78.23,61.47 90 bottom
U$286  [#GND#0]  70.61,61.47 90 bottom
U$287  [##CS##7]  85.85,61.47 90 bottom
U$288  SPARKX-LOGO4  [SPARKX-MEDIUM]  79.5,69.85 0 bottom
U$289  [SFE_LOGO_FLAME_.1]  109.22,63.5 0 top
U$290  [BREAKOUT1]  96.27,69.85 0 top
U$291  [FLASH0]  97.79,71.12 0 top
U$292  [##HLD##3#2]  93.98,61.47 90 bottom
U$293  [##WP##2#3]  96.52,61.47 90 bottom
U$294  [#3#3V#1]  109.22,61.47 90 bottom
U$295  [#CLK#6]  104.14,61.47 90 bottom
U$296  [#DI#0#5]  101.6,61.47 90 bottom
U$297  [#DO#1#4]  99.06,61.47 90 bottom
U$298  [#GND#0]  91.44,61.47 90 bottom
U$299  [##CS##7]  106.68,61.47 90 bottom
U$300  SPARKX-LOGO4  [SPARKX-MEDIUM]  100.33,69.85 0 bottom
U$301  [SFE_LOGO_FLAME_.1]  25.91,76.71 0 top
U$302  [BREAKOUT1]  12.95,83.06 0 top
U$303  [FLASH0]  14.48,84.33 0 top
U$304  [##HLD##3#2]  10.67,74.68 90 bottom
U$305  [##WP##2#3]  13.21,74.68 90 bottom
U$306  [#3#3V#1]  25.91,74.68 90 bottom
U$307  [#CLK#6]  20.83,74.68 90 bottom
U$308  [#DI#0#5]  18.29,74.68 90 bottom
U$309  [#DO#1#4]  15.75,74.68 90 bottom
U$310  [#GND#0]  8.13,74.68 90 bottom
U$311  [##CS##7]  23.37,74.68 90 bottom
U$312  SPARKX-LOGO4  [SPARKX-MEDIUM]  17.02,83.06 0 bottom
U$313  [SFE_LOGO_FLAME_.1]  46.74,76.71 0 top
U$314  [BREAKOUT1]  33.78,83.06 0 top
U$315  [FLASH0]  35.31,84.33 0 top
U$316  [##HLD##3#2]  31.5,74.68 90 bottom
U$317  [##WP##2#3]  34.04,74.68 90 bottom
U$318  [#3#3V#1]  46.74,74.68 90 bottom
U$319  [#CLK#6]  41.66,74.68 90 bottom
U$320  [#DI#0#5]  39.12,74.68 90 bottom
U$321  [#DO#1#4]  36.58,74.68 90 bottom
U$322  [#GND#0]  28.96,74.68 90 bottom
U$323  [##CS##7]  44.2,74.68 90 bottom
U$324  SPARKX-LOGO4  [SPARKX-MEDIUM]  37.85,83.06 0 bottom
U$325  [SFE_LOGO_FLAME_.1]  67.56,76.71 0 top
U$326  [BREAKOUT1]  54.61,83.06 0 top
U$327  [FLASH0]  56.13,84.33 0 top
U$328  [##HLD##3#2]  52.32,74.68 90 bottom
U$329  [##WP##2#3]  54.86,74.68 90 bottom
U$330  [#3#3V#1]  67.56,74.68 90 bottom
U$331  [#CLK#6]  62.48,74.68 90 bottom
U$332  [#DI#0#5]  59.94,74.68 90 bottom
U$333  [#DO#1#4]  57.4,74.68 90 bottom
U$334  [#GND#0]  49.78,74.68 90 bottom
U$335  [##CS##7]  65.02,74.68 90 bottom
U$336  SPARKX-LOGO4  [SPARKX-MEDIUM]  58.67,83.06 0 bottom
U$337  [SFE_LOGO_FLAME_.1]  88.39,76.71 0 top
U$338  [BREAKOUT1]  75.44,83.06 0 top
U$339  [FLASH0]  76.96,84.33 0 top
U$340  [##HLD##3#2]  73.15,74.68 90 bottom
U$341  [##WP##2#3]  75.69,74.68 90 bottom
U$342  [#3#3V#1]  88.39,74.68 90 bottom
U$343  [#CLK#6]  83.31,74.68 90 bottom
U$344  [#DI#0#5]  80.77,74.68 90 bottom
U$345  [#DO#1#4]  78.23,74.68 90 bottom
U$346  [#GND#0]  70.61,74.68 90 bottom
U$347  [##CS##7]  85.85,74.68 90 bottom
U$348  SPARKX-LOGO4  [SPARKX-MEDIUM]  79.5,83.06 0 bottom
U$349  [SFE_LOGO_FLAME_.1]  109.22,76.71 0 top
U$350  [BREAKOUT1]  96.27,83.06 0 top
U$351  [FLASH0]  97.79,84.33 0 top
U$352  [##HLD##3#2]  93.98,74.68 90 bottom
U$353  [##WP##2#3]  96.52,74.68 90 bottom
U$354  [#3#3V#1]  109.22,74.68 90 bottom
U$355  [#CLK#6]  104.14,74.68 90 bottom
U$356  [#DI#0#5]  101.6,74.68 90 bottom
U$357  [#DO#1#4]  99.06,74.68 90 bottom
U$358  [#GND#0]  91.44,74.68 90 bottom
U$359  [##CS##7]  106.68,74.68 90 bottom
U$360  SPARKX-LOGO4  [SPARKX-MEDIUM]  100.33,83.06 0 bottom
U$361  [SFE_LOGO_FLAME_.1]  25.91,89.92 0 top
U$362  [BREAKOUT1]  12.95,96.27 0 top
U$363  [FLASH0]  14.48,97.54 0 top
U$364  [##HLD##3#2]  10.67,87.88 90 bottom
U$365  [##WP##2#3]  13.21,87.88 90 bottom
U$366  [#3#3V#1]  25.91,87.88 90 bottom
U$367  [#CLK#6]  20.83,87.88 90 bottom
U$368  [#DI#0#5]  18.29,87.88 90 bottom
U$369  [#DO#1#4]  15.75,87.88 90 bottom
U$370  [#GND#0]  8.13,87.88 90 bottom
U$371  [##CS##7]  23.37,87.88 90 bottom
U$372  SPARKX-LOGO4  [SPARKX-MEDIUM]  17.02,96.27 0 bottom
U$373  [SFE_LOGO_FLAME_.1]  46.74,89.92 0 top
U$374  [BREAKOUT1]  33.78,96.27 0 top
U$375  [FLASH0]  35.31,97.54 0 top
U$376  [##HLD##3#2]  31.5,87.88 90 bottom
U$377  [##WP##2#3]  34.04,87.88 90 bottom
U$378  [#3#3V#1]  46.74,87.88 90 bottom
U$379  [#CLK#6]  41.66,87.88 90 bottom
U$380  [#DI#0#5]  39.12,87.88 90 bottom
U$381  [#DO#1#4]  36.58,87.88 90 bottom
U$382  [#GND#0]  28.96,87.88 90 bottom
U$383  [##CS##7]  44.2,87.88 90 bottom
U$384  SPARKX-LOGO4  [SPARKX-MEDIUM]  37.85,96.27 0 bottom
U$385  [SFE_LOGO_FLAME_.1]  67.56,89.92 0 top
U$386  [BREAKOUT1]  54.61,96.27 0 top
U$387  [FLASH0]  56.13,97.54 0 top
U$388  [##HLD##3#2]  52.32,87.88 90 bottom
U$389  [##WP##2#3]  54.86,87.88 90 bottom
U$390  [#3#3V#1]  67.56,87.88 90 bottom
U$391  [#CLK#6]  62.48,87.88 90 bottom
U$392  [#DI#0#5]  59.94,87.88 90 bottom
U$393  [#DO#1#4]  57.4,87.88 90 bottom
U$394  [#GND#0]  49.78,87.88 90 bottom
U$395  [##CS##7]  65.02,87.88 90 bottom
U$396  SPARKX-LOGO4  [SPARKX-MEDIUM]  58.67,96.27 0 bottom
U$397  [SFE_LOGO_FLAME_.1]  88.39,89.92 0 top
U$398  [BREAKOUT1]  75.44,96.27 0 top
U$399  [FLASH0]  76.96,97.54 0 top
U$400  [##HLD##3#2]  73.15,87.88 90 bottom
U$401  [##WP##2#3]  75.69,87.88 90 bottom
U$402  [#3#3V#1]  88.39,87.88 90 bottom
U$403  [#CLK#6]  83.31,87.88 90 bottom
U$404  [#DI#0#5]  80.77,87.88 90 bottom
U$405  [#DO#1#4]  78.23,87.88 90 bottom
U$406  [#GND#0]  70.61,87.88 90 bottom
U$407  [##CS##7]  85.85,87.88 90 bottom
U$408  SPARKX-LOGO4  [SPARKX-MEDIUM]  79.5,96.27 0 bottom
U$409  [SFE_LOGO_FLAME_.1]  109.22,89.92 0 top
U$410  [BREAKOUT1]  96.27,96.27 0 top
U$411  [FLASH0]  97.79,97.54 0 top
U$412  [##HLD##3#2]  93.98,87.88 90 bottom
U$413  [##WP##2#3]  96.52,87.88 90 bottom
U$414  [#3#3V#1]  109.22,87.88 90 bottom
U$415  [#CLK#6]  104.14,87.88 90 bottom
U$416  [#DI#0#5]  101.6,87.88 90 bottom
U$417  [#DO#1#4]  99.06,87.88 90 bottom
U$418  [#GND#0]  91.44,87.88 90 bottom
U$419  [##CS##7]  106.68,87.88 90 bottom
U$420  SPARKX-LOGO4  [SPARKX-MEDIUM]  100.33,96.27 0 bottom
U$421  [SFE_LOGO_FLAME_.1]  25.91,103.12 0 top
U$422  [BREAKOUT1]  12.95,109.47 0 top
U$423  [FLASH0]  14.48,110.74 0 top
U$424  [##HLD##3#2]  10.67,101.09 90 bottom
U$425  [##WP##2#3]  13.21,101.09 90 bottom
U$426  [#3#3V#1]  25.91,101.09 90 bottom
U$427  [#CLK#6]  20.83,101.09 90 bottom
U$428  [#DI#0#5]  18.29,101.09 90 bottom
U$429  [#DO#1#4]  15.75,101.09 90 bottom
U$430  [#GND#0]  8.13,101.09 90 bottom
U$431  [##CS##7]  23.37,101.09 90 bottom
U$432  SPARKX-LOGO4  [SPARKX-MEDIUM]  17.02,109.47 0 bottom
U$433  [SFE_LOGO_FLAME_.1]  46.74,103.12 0 top
U$434  [BREAKOUT1]  33.78,109.47 0 top
U$435  [FLASH0]  35.31,110.74 0 top
U$436  [##HLD##3#2]  31.5,101.09 90 bottom
U$437  [##WP##2#3]  34.04,101.09 90 bottom
U$438  [#3#3V#1]  46.74,101.09 90 bottom
U$439  [#CLK#6]  41.66,101.09 90 bottom
U$440  [#DI#0#5]  39.12,101.09 90 bottom
U$441  [#DO#1#4]  36.58,101.09 90 bottom
U$442  [#GND#0]  28.96,101.09 90 bottom
U$443  [##CS##7]  44.2,101.09 90 bottom
U$444  SPARKX-LOGO4  [SPARKX-MEDIUM]  37.85,109.47 0 bottom
U$445  [SFE_LOGO_FLAME_.1]  67.56,103.12 0 top
U$446  [BREAKOUT1]  54.61,109.47 0 top
U$447  [FLASH0]  56.13,110.74 0 top
U$448  [##HLD##3#2]  52.32,101.09 90 bottom
U$449  [##WP##2#3]  54.86,101.09 90 bottom
U$450  [#3#3V#1]  67.56,101.09 90 bottom
U$451  [#CLK#6]  62.48,101.09 90 bottom
U$452  [#DI#0#5]  59.94,101.09 90 bottom
U$453  [#DO#1#4]  57.4,101.09 90 bottom
U$454  [#GND#0]  49.78,101.09 90 bottom
U$455  [##CS##7]  65.02,101.09 90 bottom
U$456  SPARKX-LOGO4  [SPARKX-MEDIUM]  58.67,109.47 0 bottom
U$457  [SFE_LOGO_FLAME_.1]  88.39,103.12 0 top
U$458  [BREAKOUT1]  75.44,109.47 0 top
U$459  [FLASH0]  76.96,110.74 0 top
U$460  [##HLD##3#2]  73.15,101.09 90 bottom
U$461  [##WP##2#3]  75.69,101.09 90 bottom
U$462  [#3#3V#1]  88.39,101.09 90 bottom
U$463  [#CLK#6]  83.31,101.09 90 bottom
U$464  [#DI#0#5]  80.77,101.09 90 bottom
U$465  [#DO#1#4]  78.23,101.09 90 bottom
U$466  [#GND#0]  70.61,101.09 90 bottom
U$467  [##CS##7]  85.85,101.09 90 bottom
U$468  SPARKX-LOGO4  [SPARKX-MEDIUM]  79.5,109.47 0 bottom
U$469  [SFE_LOGO_FLAME_.1]  109.22,103.12 0 top
U$470  [BREAKOUT1]  96.27,109.47 0 top
U$471  [FLASH0]  97.79,110.74 0 top
U$472  [##HLD##3#2]  93.98,101.09 90 bottom
U$473  [##WP##2#3]  96.52,101.09 90 bottom
U$474  [#3#3V#1]  109.22,101.09 90 bottom
U$475  [#CLK#6]  104.14,101.09 90 bottom
U$476  [#DI#0#5]  101.6,101.09 90 bottom
U$477  [#DO#1#4]  99.06,101.09 90 bottom
U$478  [#GND#0]  91.44,101.09 90 bottom
U$479  [##CS##7]  106.68,101.09 90 bottom
U$480  SPARKX-LOGO4  [SPARKX-MEDIUM]  100.33,109.47 0 bottom

## Library data of the parts
C1-C40 = SparkFun-Capacitors; PROD_ID: CAP-00810
E$1-E$4 FD1-FD80 LOGO1-LOGO40 U$6 U$13 U$25 U$37 U$49 U$61 U$73 U$85 U$97 U$109 U$121 U$133 U$145 U$157 U$169 U$181 U$193 U$205 U$217 U$229 U$241 U$253 U$265 U$277 U$289 U$301 U$313 U$325 U$337 U$349 U$361 U$373 U$385 U$397 U$409 U$421 U$433 U$445 U$457 U$469 = SparkFun-Aesthetics
E$5 = SparkFun-Retired
J1-J40 = SparkFun-Connectors
U1-U40 = SparkFun-MicroMod; PROD_ID: IC-15107
U$1 U$2 U$4 U$5 U$7-U$12 U$14-U$23 U$26-U$35 U$38-U$47 U$50-U$59 U$62-U$71 U$74-U$83 U$86-U$95 U$98-U$107 U$110-U$119 U$122-U$131 U$134-U$143 U$146-U$155 U$158-U$167 U$170-U$179 U$182-U$191 U$194-U$203 U$206-U$215 U$218-U$227 U$230-U$239 U$242-U$251 U$254-U$263 U$266-U$275 U$278-U$287 U$290-U$299 U$302-U$311 U$314-U$323 U$326-U$335 U$338-U$347 U$350-U$359 U$362-U$371 U$374-U$383 U$386-U$395 U$398-U$407 U$410-U$419 U$422-U$431 U$434-U$443 U$446-U$455 U$458-U$467 U$470-U$479 = output
U$3 U$24 U$36 U$48 U$60 U$72 U$84 U$96 U$108 U$120 U$132 U$144 U$156 U$168 U$180 U$192 U$204 U$216 U$228 U$240 U$252 U$264 U$276 U$288 U$300 U$312 U$324 U$336 U$348 U$360 U$372 U$384 U$396 U$408 U$420 U$432 U$444 U$456 U$468 U$480 = SparkX

## Nets
3.3V: C29.1 J1.1 U4.8
3.3V1: C1.1 J2.1 U1.8
3.3V2: C2.1 J3.1 U2.8
3.3V3: C3.1 J4.1 U3.8
3.3V4: C4.1 J5.1 U5.8
3.3V5: C5.1 J6.1 U6.8
3.3V6: C6.1 J7.1 U7.8
3.3V7: C7.1 J8.1 U8.8
3.3V8: C8.1 J9.1 U9.8
3.3V9: C9.1 J10.1 U10.8
3.3V10: C10.1 J11.1 U11.8
3.3V11: C11.1 J12.1 U12.8
3.3V12: C12.1 J13.1 U13.8
3.3V13: C13.1 J14.1 U14.8
3.3V14: C14.1 J15.1 U15.8
3.3V15: C15.1 J16.1 U16.8
3.3V16: C16.1 J17.1 U17.8
3.3V17: C17.1 J18.1 U18.8
3.3V18: C18.1 J19.1 U19.8
3.3V19: C19.1 J20.1 U20.8
3.3V20: C20.1 J21.1 U21.8
3.3V21: C21.1 J22.1 U22.8
3.3V22: C22.1 J23.1 U23.8
3.3V23: C23.1 J24.1 U24.8
3.3V24: C24.1 J25.1 U25.8
3.3V25: C25.1 J26.1 U26.8
3.3V26: C26.1 J27.1 U27.8
3.3V27: C27.1 J28.1 U28.8
3.3V28: C28.1 J29.1 U29.8
3.3V29: C30.1 J30.1 U30.8
3.3V30: C31.1 J31.1 U31.8
3.3V31: C32.1 J32.1 U32.8
3.3V32: C33.1 J33.1 U33.8
3.3V33: C34.1 J34.1 U34.8
3.3V34: C35.1 J35.1 U35.8
3.3V35: C36.1 J36.1 U36.8
3.3V36: C37.1 J37.1 U37.8
3.3V37: C38.1 J38.1 U38.8
3.3V38: C39.1 J39.1 U39.8
3.3V39: C40.1 J40.1 U40.8
GND: C29.2 J1.8 U4.4
GND1: C1.2 J2.8 U1.4
GND2: C2.2 J3.8 U2.4
GND3: C3.2 J4.8 U3.4
GND4: C4.2 J5.8 U5.4
GND5: C5.2 J6.8 U6.4
GND6: C6.2 J7.8 U7.4
GND7: C7.2 J8.8 U8.4
GND8: C8.2 J9.8 U9.4
GND9: C9.2 J10.8 U10.4
GND10: C10.2 J11.8 U11.4
GND11: C11.2 J12.8 U12.4
GND12: C12.2 J13.8 U13.4
GND13: C13.2 J14.8 U14.4
GND14: C14.2 J15.8 U15.4
GND15: C15.2 J16.8 U16.4
GND16: C16.2 J17.8 U17.4
GND17: C17.2 J18.8 U18.4
GND18: C18.2 J19.8 U19.4
GND19: C19.2 J20.8 U20.4
GND20: C20.2 J21.8 U21.4
GND21: C21.2 J22.8 U22.4
GND22: C22.2 J23.8 U23.4
GND23: C23.2 J24.8 U24.4
GND24: C24.2 J25.8 U25.4
GND25: C25.2 J26.8 U26.4
GND26: C26.2 J27.8 U27.4
GND27: C27.2 J28.8 U28.4
GND28: C28.2 J29.8 U29.4
GND29: C30.2 J30.8 U30.4
GND30: C31.2 J31.8 U31.4
GND31: C32.2 J32.8 U32.4
GND32: C33.2 J33.8 U33.4
GND33: C34.2 J34.8 U34.4
GND34: C35.2 J35.8 U35.4
GND35: C36.2 J36.8 U36.4
GND36: C37.2 J37.8 U37.4
GND37: C38.2 J38.8 U38.4
GND38: C39.2 J39.8 U39.4
GND39: C40.2 J40.8 U40.4
QSPI0/DI: J1.4 U4.5
QSPI0/DI1: J2.4 U1.5
QSPI0/DI2: J3.4 U2.5
QSPI0/DI3: J4.4 U3.5
QSPI0/DI4: J5.4 U5.5
QSPI0/DI5: J6.4 U6.5
QSPI0/DI6: J7.4 U7.5
QSPI0/DI7: J8.4 U8.5
QSPI0/DI8: J9.4 U9.5
QSPI0/DI9: J10.4 U10.5
QSPI0/DI10: J11.4 U11.5
QSPI0/DI11: J12.4 U12.5
QSPI0/DI12: J13.4 U13.5
QSPI0/DI13: J14.4 U14.5
QSPI0/DI14: J15.4 U15.5
QSPI0/DI15: J16.4 U16.5
QSPI0/DI16: J17.4 U17.5
QSPI0/DI17: J18.4 U18.5
QSPI0/DI18: J19.4 U19.5
QSPI0/DI19: J20.4 U20.5
QSPI0/DI20: J21.4 U21.5
QSPI0/DI21: J22.4 U22.5
QSPI0/DI22: J23.4 U23.5
QSPI0/DI23: J24.4 U24.5
QSPI0/DI24: J25.4 U25.5
QSPI0/DI25: J26.4 U26.5
QSPI0/DI26: J27.4 U27.5
QSPI0/DI27: J28.4 U28.5
QSPI0/DI28: J29.4 U29.5
QSPI0/DI29: J30.4 U30.5
QSPI0/DI30: J31.4 U31.5
QSPI0/DI31: J32.4 U32.5
QSPI0/DI32: J33.4 U33.5
QSPI0/DI33: J34.4 U34.5
QSPI0/DI34: J35.4 U35.5
QSPI0/DI35: J36.4 U36.5
QSPI0/DI36: J37.4 U37.5
QSPI0/DI37: J38.4 U38.5
QSPI0/DI38: J39.4 U39.5
QSPI0/DI39: J40.4 U40.5
QSPI1/DO: J1.5 U4.2
QSPI1/DO1: J2.5 U1.2
QSPI1/DO2: J3.5 U2.2
QSPI1/DO3: J4.5 U3.2
QSPI1/DO4: J5.5 U5.2
QSPI1/DO5: J6.5 U6.2
QSPI1/DO6: J7.5 U7.2
QSPI1/DO7: J8.5 U8.2
QSPI1/DO8: J9.5 U9.2
QSPI1/DO9: J10.5 U10.2
QSPI1/DO10: J11.5 U11.2
QSPI1/DO11: J12.5 U12.2
QSPI1/DO12: J13.5 U13.2
QSPI1/DO13: J14.5 U14.2
QSPI1/DO14: J15.5 U15.2
QSPI1/DO15: J16.5 U16.2
QSPI1/DO16: J17.5 U17.2
QSPI1/DO17: J18.5 U18.2
QSPI1/DO18: J19.5 U19.2
QSPI1/DO19: J20.5 U20.2
QSPI1/DO20: J21.5 U21.2
QSPI1/DO21: J22.5 U22.2
QSPI1/DO22: J23.5 U23.2
QSPI1/DO23: J24.5 U24.2
QSPI1/DO24: J25.5 U25.2
QSPI1/DO25: J26.5 U26.2
QSPI1/DO26: J27.5 U27.2
QSPI1/DO27: J28.5 U28.2
QSPI1/DO28: J29.5 U29.2
QSPI1/DO29: J30.5 U30.2
QSPI1/DO30: J31.5 U31.2
QSPI1/DO31: J32.5 U32.2
QSPI1/DO32: J33.5 U33.2
QSPI1/DO33: J34.5 U34.2
QSPI1/DO34: J35.5 U35.2
QSPI1/DO35: J36.5 U36.2
QSPI1/DO36: J37.5 U37.2
QSPI1/DO37: J38.5 U38.2
QSPI1/DO38: J39.5 U39.2
QSPI1/DO39: J40.5 U40.2
QSPI2/!WP!: J1.6 U4.3
QSPI2/!WP!1: J2.6 U1.3
QSPI2/!WP!2: J3.6 U2.3
QSPI2/!WP!3: J4.6 U3.3
QSPI2/!WP!4: J5.6 U5.3
QSPI2/!WP!5: J6.6 U6.3
QSPI2/!WP!6: J7.6 U7.3
QSPI2/!WP!7: J8.6 U8.3
QSPI2/!WP!8: J9.6 U9.3
QSPI2/!WP!9: J10.6 U10.3
QSPI2/!WP!10: J11.6 U11.3
QSPI2/!WP!11: J12.6 U12.3
QSPI2/!WP!12: J13.6 U13.3
QSPI2/!WP!13: J14.6 U14.3
QSPI2/!WP!14: J15.6 U15.3
QSPI2/!WP!15: J16.6 U16.3
QSPI2/!WP!16: J17.6 U17.3
QSPI2/!WP!17: J18.6 U18.3
QSPI2/!WP!18: J19.6 U19.3
QSPI2/!WP!19: J20.6 U20.3
QSPI2/!WP!20: J21.6 U21.3
QSPI2/!WP!21: J22.6 U22.3
QSPI2/!WP!22: J23.6 U23.3
QSPI2/!WP!23: J24.6 U24.3
QSPI2/!WP!24: J25.6 U25.3
QSPI2/!WP!25: J26.6 U26.3
QSPI2/!WP!26: J27.6 U27.3
QSPI2/!WP!27: J28.6 U28.3
QSPI2/!WP!28: J29.6 U29.3
QSPI2/!WP!29: J30.6 U30.3
QSPI2/!WP!30: J31.6 U31.3
QSPI2/!WP!31: J32.6 U32.3
QSPI2/!WP!32: J33.6 U33.3
QSPI2/!WP!33: J34.6 U34.3
QSPI2/!WP!34: J35.6 U35.3
QSPI2/!WP!35: J36.6 U36.3
QSPI2/!WP!36: J37.6 U37.3
QSPI2/!WP!37: J38.6 U38.3
QSPI2/!WP!38: J39.6 U39.3
QSPI2/!WP!39: J40.6 U40.3
QSPI3/!HOLD!: J1.7 U4.7
QSPI3/!HOLD!1: J2.7 U1.7
QSPI3/!HOLD!2: J3.7 U2.7
QSPI3/!HOLD!3: J4.7 U3.7
QSPI3/!HOLD!4: J5.7 U5.7
QSPI3/!HOLD!5: J6.7 U6.7
QSPI3/!HOLD!6: J7.7 U7.7
QSPI3/!HOLD!7: J8.7 U8.7
QSPI3/!HOLD!8: J9.7 U9.7
QSPI3/!HOLD!9: J10.7 U10.7
QSPI3/!HOLD!10: J11.7 U11.7
QSPI3/!HOLD!11: J12.7 U12.7
QSPI3/!HOLD!12: J13.7 U13.7
QSPI3/!HOLD!13: J14.7 U14.7
QSPI3/!HOLD!14: J15.7 U15.7
QSPI3/!HOLD!15: J16.7 U16.7
QSPI3/!HOLD!16: J17.7 U17.7
QSPI3/!HOLD!17: J18.7 U18.7
QSPI3/!HOLD!18: J19.7 U19.7
QSPI3/!HOLD!19: J20.7 U20.7
QSPI3/!HOLD!20: J21.7 U21.7
QSPI3/!HOLD!21: J22.7 U22.7
QSPI3/!HOLD!22: J23.7 U23.7
QSPI3/!HOLD!23: J24.7 U24.7
QSPI3/!HOLD!24: J25.7 U25.7
QSPI3/!HOLD!25: J26.7 U26.7
QSPI3/!HOLD!26: J27.7 U27.7
QSPI3/!HOLD!27: J28.7 U28.7
QSPI3/!HOLD!28: J29.7 U29.7
QSPI3/!HOLD!29: J30.7 U30.7
QSPI3/!HOLD!30: J31.7 U31.7
QSPI3/!HOLD!31: J32.7 U32.7
QSPI3/!HOLD!32: J33.7 U33.7
QSPI3/!HOLD!33: J34.7 U34.7
QSPI3/!HOLD!34: J35.7 U35.7
QSPI3/!HOLD!35: J36.7 U36.7
QSPI3/!HOLD!36: J37.7 U37.7
QSPI3/!HOLD!37: J38.7 U38.7
QSPI3/!HOLD!38: J39.7 U39.7
QSPI3/!HOLD!39: J40.7 U40.7
QSPI-!CS!: J1.2 U4.1
QSPI-!CS!1: J2.2 U1.1
QSPI-!CS!2: J3.2 U2.1
QSPI-!CS!3: J4.2 U3.1
QSPI-!CS!4: J5.2 U5.1
QSPI-!CS!5: J6.2 U6.1
QSPI-!CS!6: J7.2 U7.1
QSPI-!CS!7: J8.2 U8.1
QSPI-!CS!8: J9.2 U9.1
QSPI-!CS!9: J10.2 U10.1
QSPI-!CS!10: J11.2 U11.1
QSPI-!CS!11: J12.2 U12.1
QSPI-!CS!12: J13.2 U13.1
QSPI-!CS!13: J14.2 U14.1
QSPI-!CS!14: J15.2 U15.1
QSPI-!CS!15: J16.2 U16.1
QSPI-!CS!16: J17.2 U17.1
QSPI-!CS!17: J18.2 U18.1
QSPI-!CS!18: J19.2 U19.1
QSPI-!CS!19: J20.2 U20.1
QSPI-!CS!20: J21.2 U21.1
QSPI-!CS!21: J22.2 U22.1
QSPI-!CS!22: J23.2 U23.1
QSPI-!CS!23: J24.2 U24.1
QSPI-!CS!24: J25.2 U25.1
QSPI-!CS!25: J26.2 U26.1
QSPI-!CS!26: J27.2 U27.1
QSPI-!CS!27: J28.2 U28.1
QSPI-!CS!28: J29.2 U29.1
QSPI-!CS!29: J30.2 U30.1
QSPI-!CS!30: J31.2 U31.1
QSPI-!CS!31: J32.2 U32.1
QSPI-!CS!32: J33.2 U33.1
QSPI-!CS!33: J34.2 U34.1
QSPI-!CS!34: J35.2 U35.1
QSPI-!CS!35: J36.2 U36.1
QSPI-!CS!36: J37.2 U37.1
QSPI-!CS!37: J38.2 U38.1
QSPI-!CS!38: J39.2 U39.1
QSPI-!CS!39: J40.2 U40.1
QSPI-CLK [Clock]: J1.3 U4.6
QSPI-CLK1 [Clock]: J2.3 U1.6
QSPI-CLK2 [Clock]: J3.3 U2.6
QSPI-CLK3 [Clock]: J4.3 U3.6
QSPI-CLK4 [Clock]: J5.3 U5.6
QSPI-CLK5 [Clock]: J6.3 U6.6
QSPI-CLK6 [Clock]: J7.3 U7.6
QSPI-CLK7 [Clock]: J8.3 U8.6
QSPI-CLK8 [Clock]: J9.3 U9.6
QSPI-CLK9 [Clock]: J10.3 U10.6
QSPI-CLK10 [Clock]: J11.3 U11.6
QSPI-CLK11 [Clock]: J12.3 U12.6
QSPI-CLK12 [Clock]: J13.3 U13.6
QSPI-CLK13 [Clock]: J14.3 U14.6
QSPI-CLK14 [Clock]: J15.3 U15.6
QSPI-CLK15 [Clock]: J16.3 U16.6
QSPI-CLK16 [Clock]: J17.3 U17.6
QSPI-CLK17 [Clock]: J18.3 U18.6
QSPI-CLK18 [Clock]: J19.3 U19.6
QSPI-CLK19 [Clock]: J20.3 U20.6
QSPI-CLK20 [Clock]: J21.3 U21.6
QSPI-CLK21 [Clock]: J22.3 U22.6
QSPI-CLK22 [Clock]: J23.3 U23.6
QSPI-CLK23 [Clock]: J24.3 U24.6
QSPI-CLK24 [Clock]: J25.3 U25.6
QSPI-CLK25 [Clock]: J26.3 U26.6
QSPI-CLK26 [Clock]: J27.3 U27.6
QSPI-CLK27 [Clock]: J28.3 U28.6
QSPI-CLK28 [Clock]: J29.3 U29.6
QSPI-CLK29 [Clock]: J30.3 U30.6
QSPI-CLK30 [Clock]: J31.3 U31.6
QSPI-CLK31 [Clock]: J32.3 U32.6
QSPI-CLK32 [Clock]: J33.3 U33.6
QSPI-CLK33 [Clock]: J34.3 U34.6
QSPI-CLK34 [Clock]: J35.3 U35.6
QSPI-CLK35 [Clock]: J36.3 U36.6
QSPI-CLK36 [Clock]: J37.3 U37.6
QSPI-CLK37 [Clock]: J38.3 U38.6
QSPI-CLK38 [Clock]: J39.3 U39.6
QSPI-CLK39 [Clock]: J40.3 U40.6